# EAGLE board GameB (EAGLE 9.6.2)
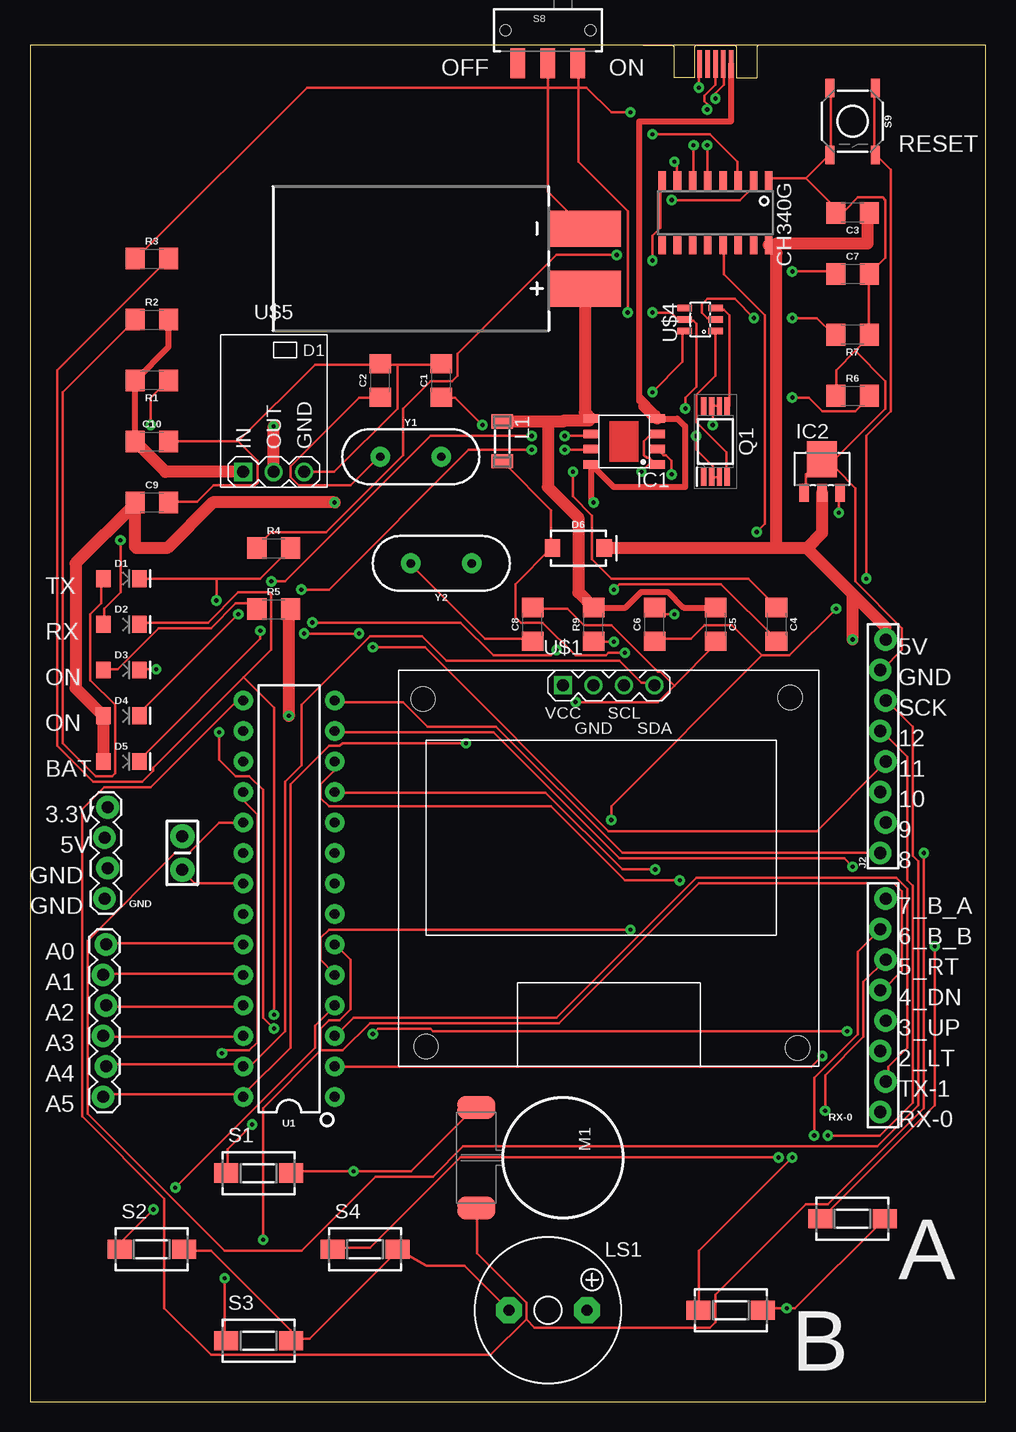
[diagram p0: board, top side]
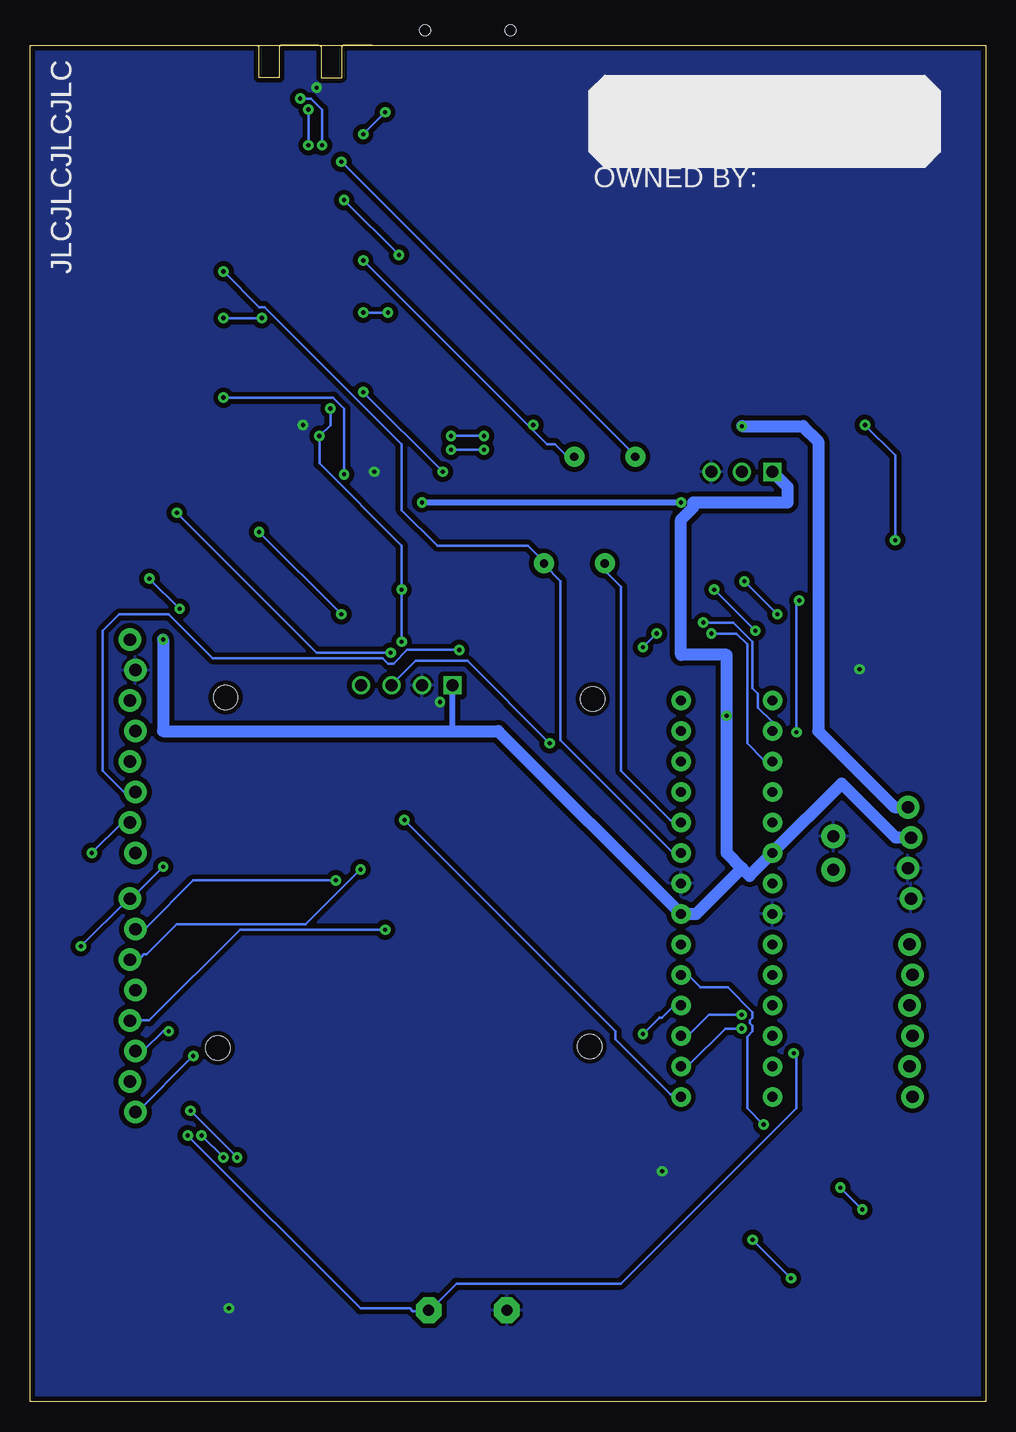
[diagram p1: board, bottom side, seen from below]

Size 79.68 x 113.03 mm. Coordinates in mm from the lower left corner, seen from the top.
Outline: 0,0 79.68,0 79.68,113.02 0,113.02 0,0
Copper layers (1*16): Top 0.035mm / dielectric 1.6mm / Bottom 0.035mm
Design rules "default *": minimum track width 8mil, minimum drill 0.35mm, track to track 10mil, track to pad 10mil, pad to pad 10mil, via to via 10mil, smd to smd 10mil, copper to edge 10mil, drill to drill 10mil, minimum pad ring 10mil, minimum via ring 10mil, stop-mask expansion 10mil, vias tented up to drill 0mil, thermal gap 10mil
Net classes: 0 default: width 0.152 mm, drill 0.305 mm, clearance 0.152 mm

## Footprints (pad centres in the part's own frame; a part is rotated, then mirrored left to right if it is on the bottom)
LIPO-110-TABS = smd 3 x 6: + 2.5,14.5; - -2.5,14.5
1206 = smd 1.6 x 1.8: 1 -1.4,0; 2 1.4,0
CAP-PTH-SMALL-KIT = drill 1.016 pad 2.032: 1 -1.397,0; 2 1.397,0
LED-1206 = smd 1.2 x 1.4: A -1.5,0; C 1.5,0
SMA-DIODE = smd 1.27 x 1.47: A -2.15,0; C 2.15,0
1X04_LOCK = drill 1.016 pad 1.88: 1 0,0.127; 2 2.54,-0.127; 3 5.08,0.127; 4 7.62,-0.127
SOP-8 = smd 1.3 x 0.7: 1 -2.75,1.905; 2 -2.75,0.635; 3 -2.75,-0.635; 4 -2.75,-1.905; 5 2.75,-1.905; 6 2.75,-0.635; 7 2.75,0.635; 8 2.75,1.905
SOT89 = smd 0.8 x 1.5: 1 -1.5,-1.75; 2 0,-1.75; 3 1.5,-1.75 | smd 2.5 x 3: 4 0,1.05
1X08_FEMALE_LOCK = drill 1.016 pad 1.88: 1 0,0.229; 2 2.54,-0.229; 3 5.08,0.229; 4 7.62,-0.229; 5 10.16,0.229; 6 12.7,-0.229; 7 15.24,0.229; 8 17.78,-0.229
1X06_LOCK = drill 1.016 pad 1.88: 1 0,0; 2 2.54,-0.254; 3 5.08,0; 4 7.62,-0.254; 5 10.16,0; 6 12.7,-0.254
SM-1206 = smd 1.2 x 1.8: 1 -1.65,0; 2 1.65,0
F/QMX = drill 0.914 pad 2.159 octagon: + 3.251,0; - -3.251,0
VIBE-MOTOR-10MM-SMD = smd 1.905 x 3.175: + 4.191,-7.239; - -4.191,-7.239
SOP65P640X120-8N = smd 1.475 x 0.45: 1 -2.938,0.975; 2 -2.938,0.325; 3 -2.938,-0.325; 4 -2.938,-0.975; 5 2.938,-0.975; 6 2.938,-0.325; 7 2.938,0.325; 8 2.938,0.975
DTSM-3 = smd 2 x 1.6: 1 -2.7,0; 2 2.7,0
SWITCH_SPDT_SMD = smd 1.2 x 2.5: 1 -2.5,-2.75; 2 0,-2.75; 3 2.5,-2.75 | hole 0.9: -3.55,0; 3.55,0
TACTILE_SWITCH_SMD_5.2MM = smd 1.524 x 0.762: 1 -2.794,1.905; 2 2.794,1.905; 3 -2.794,-1.905; 4 2.794,-1.905
DIP28 = drill 0.813 pad 1.626: 1 -16.51,-3.81; 2 -13.97,-3.81; 3 -11.43,-3.81; 4 -8.89,-3.81; 5 -6.35,-3.81; 6 -3.81,-3.81; 7 -1.27,-3.81; 8 1.27,-3.81; 9 3.81,-3.81; 10 6.35,-3.81; 11 8.89,-3.81; 12 11.43,-3.81; 13 13.97,-3.81; 14 16.51,-3.81; 15 16.51,3.81; 16 13.97,3.81; 17 11.43,3.81; 18 8.89,3.81; 19 6.35,3.81; 20 3.81,3.81; 21 1.27,3.81; 22 -1.27,3.81; 23 -3.81,3.81; 24 -6.35,3.81; 25 -8.89,3.81; 26 -11.43,3.81; 27 -13.97,3.81; 28 -16.51,3.81
DISPLAY-OLED-128X64-I2C = drill 1 square: 1 0,12.7 | drill 1: 2 2.54,12.7; 3 5.08,12.7; 4 7.62,12.7 | hole 2: -11.684,11.557; 18.923,11.684; 19.558,-17.526; -11.43,-17.399
SOIC16 = smd 0.635 x 1.524: 1 -4.445,-2.695; 2 -3.175,-2.695; 3 -1.905,-2.695; 4 -0.635,-2.695; 5 0.635,-2.695; 6 1.905,-2.695; 7 3.175,-2.695; 8 4.445,-2.695; 9 4.445,2.695; 10 3.175,2.695; 11 1.905,2.695; 12 0.635,2.695; 13 -0.635,2.695; 14 -1.905,2.695; 15 -3.175,2.695; 16 -4.445,2.695
USB_TYPE_B_SS_1 = smd 0.37 x 2.3: 1 -1.3,-1.55; 2 -0.65,-1.55; 3 0,-1.55; 4 0.65,-1.55; 5 1.3,-1.55
SOT23-6 = smd 0.55 x 1.2: 1 -0.95,-1.3; 2 0,-1.3; 3 0.95,-1.3; 4 0.95,1.3; 5 0,1.3; 6 -0.95,1.3
REG-AMS1117-3P = drill 1 square: 1 -2.54,-5.08 | drill 1: 2 0,-5.08; 3 2.54,-5.08
HC49US = drill 0.7 pad 1.651: 1 -2.54,0; 2 2.54,0

## Placement (x,y rotation side)
BT1  6.8MM_COIN_CELL  [LIPO-110-TABS]  31.75,95.25 270 top
C1  22p  [1206]  34.29,85.09 90 top
C2  22p  [1206]  29.21,85.09 90 top
C3  12uF  [1206]  68.58,99.06 180 top
C4  100nF  [1206]  62.23,64.77 270 top
C5  10uF  [1206]  57.15,64.77 270 top
C6  100nF  [1206]  52.07,64.77 90 top
C7  22pF  [1206]  68.58,93.98 0 top
C8  22pF  [1206]  41.91,64.77 90 top
C9  0.1p  [1206]  10.16,74.93 0 top
C10  12uF  [1206]  10.16,80.01 0 top
C11  0.1uF  [CAP-PTH-SMALL-KIT]  12.7,45.72 90 top
D1  YELLOW  [LED-1206]  7.62,68.58 0 top
D2  YELLOW  [LED-1206]  7.62,64.77 0 top
D3  GREEN  [LED-1206]  7.62,60.96 0 top
D4  GREEN  [LED-1206]  7.62,57.15 0 top
D5  RED  [LED-1206]  7.62,53.34 0 top
D6  1A/40V/500mV  [SMA-DIODE]  45.72,71.12 0 top
GND  [1X04_LOCK]  6.35,41.91 90 top
IC1  TP4056  [SOP-8]  49.53,80.01 180 top
IC2  L78LXXCU/BU  [SOT89]  66.04,77.47 0 top
J2  [1X08_FEMALE_LOCK]  71.12,45.72 90 top
J3  [1X06_LOCK]  6.35,38.1 270 top
L1  22uH  [SM-1206]  39.37,80.01 270 top
LS1  F/QMX  [F/QMX]  43.18,7.62 0 top
M1  MOTORSHORT  [VIBE-MOTOR-10MM-SMD]  44.45,20.32 270 top
Q1  FS8205A  [SOP65P640X120-8N]  57.15,80.01 90 top
R1  1k  [1206]  10.16,85.09 180 top
R2  1k  [1206]  10.16,90.17 0 top
R3  1k  [1206]  10.16,95.25 0 top
R4  1k  [1206]  20.32,71.12 0 top
R5  1k  [1206]  20.32,66.04 0 top
R6  1.2k  [1206]  68.58,83.82 0 top
R7  1k  [1206]  68.58,88.9 180 top
R9  1k  [1206]  46.99,64.77 90 top
RX-0  [1X08_FEMALE_LOCK]  71.12,24.13 90 top
S1  DTSM-3  [DTSM-3]  19.05,19.05 0 top
S2  DTSM-3  [DTSM-3]  10.16,12.7 0 top
S3  DTSM-3  [DTSM-3]  19.05,5.08 0 top
S4  DTSM-3  [DTSM-3]  27.94,12.7 0 top
S5  DTSM-3  [DTSM-3]  58.42,7.62 0 top
S6  DTSM-3  [DTSM-3]  68.58,15.24 0 top
S8  [SWITCH_SPDT_SMD]  43.18,114.3 0 top
S9  MOMENTARY-SWITCH-SPST-SMD-5.2-REDUNDANT  [TACTILE_SWITCH_SMD_5.2MM]  68.58,106.68 270 top
U1  328P  [DIP28]  21.59,41.91 90 top
U$1  DISPLAY-OLED-128X64-I2C  [DISPLAY-OLED-128X64-I2C]  44.45,46.99 0 top
U$2  CH340G  [SOIC16]  57.15,99.06 180 top
U$3  PCB_MICRO_USB_BSS_1  [USB_TYPE_B_SS_1]  57.15,113.03 0 top
U$4  DW01A  [SOT23-6]  55.88,90.17 90 top
U$5  REG-AMS1117-3P-3.3V  [REG-AMS1117-3P]  20.32,82.55 0 top
Y1  12000  [HC49US]  31.75,78.74 0 top
Y2  16MHz  [HC49US]  34.29,69.85 180 top

## Library data of the parts
BT1 S8 = SparkFun-Retired
C1-C10 = SparkFun-Capacitors
C11 = SparkFun-Capacitors; PROD_ID: CAP-08370
D1 D2 = SparkFun-LED
D3 = SparkFun-LED; PROD_ID: DIO-00862
D4 = SparkFun-LED; PROD_ID: DIO-09911
D5 = SparkFun-LED; PROD_ID: DIO-09912
D6 = SparkFun-DiscreteSemi; PROD_ID: DIO-08053
GND = SparkFun-Connectors; PROD_ID: CONN-09696
IC1 = TP4056
IC2 = v-reg-3
J2 RX-0 = SparkFun-Connectors; PROD_ID: CONN-09233; SF_ID: PRT-09279
J3 = SparkFun-Connectors
L1 = inductor-neosid; OC_FARNELL: unknown; OC_NEWARK: unknown
LS1 = buzzer; OC_FARNELL: unknown; OC_NEWARK: unknown
M1 = SparkFun-Electromechanical; PROD_ID: COMP-13709
Q1 = FS8205A; DESCRIPTION: dual n-channel enhancement mode power MOFSET; HEIGHT: 1.2mm; MANUFACTURER_NAME: SII Semiconductor; MANUFACTURER_PART_NUMBER: FS8205A
R1-R7 R9 = SparkFun-Resistors
S1-S6 = switch-tact
S9 = SparkFun-Switches; PROD_ID: SWCH-08247; SF_SKU: COM-08720
U1 = SparkFun-IC-Microcontroller; PROD_ID: IC-09136
U$1 U$5 = diy-modules
U$2 = ch340g
U$3 = USB_pcb_connectors
U$4 = DW01A
Y1 = SparkFun-Clocks
Y2 = SparkFun-Clocks; PROD_ID: XTAL-08181; SF_ID: COM-00536

## Nets
2: RX-0.3 S2.1 U1.4
3: RX-0.4 S1.1 U1.5
3.3V: GND.4 U$5.2
4: RX-0.5 S3.1 U1.6
5: RX-0.6 S4.1 U1.11
5V: C3.1 C10.1 D6.C GND.3 IC2.2 J2.8 R1.2 R2.2 R5.2 U1.7 U1.20 U$1.1 U$2.16 U$5.1
6: RX-0.7 S5.1 U1.12
7: RX-0.8 S6.1 U1.13
8: J2.1 U1.14
9: J2.2 M1.+ U1.15
A0: J3.1 U1.23
A1: J3.2 U1.24
A2: J3.3 U1.25
A3: J3.4 U1.26
A4: J3.5 U1.27 U$1.4
A5: J3.6 U1.28 U$1.3
GND: C1.2 C2.2 C3.2 C5.2 C7.2 C8.2 C9.2 C10.2 C11.2 D3.C GND.1 GND.2 IC1.1 IC1.3 IC2.1 IC2.4 J2.7 LS1.- M1.- Q1.6 Q1.7 R6.1 R7.1 S1.2 S2.2 S3.2 S4.2 S5.2 S6.2 S9.3 S9.4 U1.8 U1.22 U$1.2 U$2.1 U$3.1 U$5.3
MISO: J2.5 LS1.+ U1.18
MOSI: J2.4 U1.17
N$1: U$2.6 U$3.4
N$2: U$2.5 U$3.3
N$5: D2.A R1.1
N$6: D1.A R2.1
N$7: C1.1 U$2.8 Y1.2
N$8: C2.1 U$2.7 Y1.1
N$9: BT1.+ C5.1 IC1.5 L1.1 R9.2
N$10: R3.1 U$2.3
N$11: R4.1 U$2.2
N$12: D3.A R5.1
N$13: D6.A IC2.3 L1.2
N$15: D4.C IC1.6
N$16: IC1.2 R6.2
N$17: C9.1 D4.A D5.A IC1.4 IC1.8 U$3.5
N$18: D5.C IC1.7
N$19: C6.2 U$2.13
N$29: R7.2 U$4.2
N$30: Q1.5 U$4.3
N$31: Q1.4 U$4.1
N$32: C4.2 Q1.2 Q1.3 R9.1 S8.3 U$4.5
N$33: C4.1 U$4.6
N$34: BT1.- S8.2
N$35: C6.1 S9.1 S9.2 U1.1
N$36: C7.1 U1.9 Y2.1
N$37: C8.1 U1.10 Y2.2
N$38: C11.1 U1.21
RX0: D1.C R4.2 RX-0.1 U1.2
SCK: J2.6 U1.19
SS: J2.3 U1.16
TX1: D2.C R3.2 RX-0.2 U1.3

## Tracks (layer width: path | path; a pad name or v marks a point on that pad's centre or on a via)
2  (via drill 0.35)
  Top 0.203: v10.29,16 7.54,13.26 7.54,12.8 S2.1 | v12.12,17.83 23.77,29.49 23.77,31.32 25.38,32.92 U1.4 | v68.12,30.86 33.6,30.86 33.38,31.09 29.03,31.09 v28.57,30.63
  Bottom 0.203: v12.12,17.83 v10.29,16 | v68.12,30.86 68.58,30.86 70.18,29.26 70.87,29.26 RX-0.3 | v28.57,30.63 27.2,32 26.98,32 26.06,32.92 25.6,32.92 U1.4
3  (via drill 0.35)
  Top 0.203: v18.52,23.09 16.46,21.03 16.46,19.2 S1.1 | v50.06,39.32 24.92,39.32 24.23,38.63 24.23,36.8 25.38,35.66 U1.5
  Bottom 0.203: v18.52,23.09 19.89,24.46 19.89,30.4 19.43,30.86 19.43,31.32 19.66,31.55 19.66,31.77 19.43,32 19.43,32.46 21.49,34.52 23.77,34.52 24.69,35.43 25.38,35.43 U1.5 | v50.06,39.32 62.18,39.32 69.72,31.77 71.32,31.77 RX-0.4
3.3V  (via drill 0.35)
  Top 1.016: U$5.2 v20.32,81.28
  Bottom 1.016: v20.32,81.28 15.24,81.28 13.97,80.01 13.97,55.88 7.62,49.53 GND.4
4  (via drill 0.35)
  Top 0.203: v16.23,10.29 16.23,5.26 S3.1 | v19.43,13.49 19.43,24.46 24.23,29.26 | 24.23,29.26 24.23,31.09 24.92,31.77 25.83,31.77 26.75,32.69 26.75,36.8 25.6,37.95 U1.6 | 24.23,29.26 26.06,29.26 28.35,31.55 44.12,31.55 55.78,43.2 72.01,43.2 72.69,42.52 72.69,35.89 71.09,34.29 RX-0.5
  Bottom 0.203: v19.43,13.49 v16.23,10.29
5  (via drill 0.35)
  Top 0.203: v62.41,20.34 35.89,20.34 28.35,12.8 25.38,12.8 S4.1 | v66.29,24.23 66.29,27.2 69.49,30.4 69.49,34.98 RX-0.6 | v52.12,44.35 49.38,44.35 42.98,50.75 25.6,50.75 U1.11
  Bottom 0.203: v66.29,24.23 v62.41,20.34 | v52.12,44.35 56.69,39.78 67.44,39.78 69.95,37.26 70.18,37.26 70.41,37.03 71.32,37.03 RX-0.6
5V  (via drill 0.35)
  Top 0.203: 62.23,96.52 61.95,96.7 61.61,96.35
  Top 0.508: 69.85,98.93 C3.1 | 71.35,64.54 J2.8 | 48.26,71.12 D6.C | 21.59,65.91 R5.2 | C10.1 R1.2 11.56,87.89 R2.2
  Top 1.016: 64.77,71.12 62.23,71.12 | IC2.2 66.04,72.39 64.77,71.12 | 64.77,71.12 68.58,67.31 | 71.35,64.54 68.58,67.31 | 62.23,71.12 62.23,95.73 61.61,96.35 U$2.16 | 62.23,71.12 48.26,71.12 | 68.58,67.31 v68.58,63.5 | v21.59,57.15 21.59,65.91 | U$5.1 11.3,77.47 C10.1 | 62.23,96.52 69.85,96.52 69.85,98.93
  Bottom 0.508: 44.45,55.88 U$1.1
  Bottom 1.016: v68.58,63.5 68.58,55.88 44.45,55.88 40.64,55.88 U1.7 24.13,40.64 20.32,44.45 | GND.3 7.49,46.99 12,51.5 U1.20 19.68,43.81 20.32,44.45 | 20.32,44.45 21.59,45.72 v21.59,57.15 21.59,62.23 25.4,62.23 25.4,73.49 24.38,74.51 24.38,74.93 16.51,74.93 16.51,76.2 U$5.1
6  (via drill 0.35)
  Top 0.203: v63.55,20.34 55.78,12.57 55.78,7.77 S5.1 | v65.38,22.17 65.38,26.98 69.04,30.63 69.04,37.49 70.87,39.32 RX-0.7 | v54.18,43.43 49.61,43.43 43.43,49.61 24.92,49.61 24.23,50.29 24.23,51.44 25.38,52.58 25.38,53.26 U1.12
  Bottom 0.203: v65.38,22.17 v63.55,20.34 | v54.18,43.43 66.06,43.43 69.95,39.55 70.87,39.55 RX-0.7
7  (via drill 0.35)
  Top 0.203: v75.44,37.95 75.44,24.69 66.06,15.32 S6.1 | v68.58,44.58 67.89,45.26 49.15,45.26 38.63,55.78 25.6,55.78 U1.13
  Bottom 0.203: v75.44,37.95 71.55,41.83 RX-0.8 71.32,41.83 v68.58,44.58
8
  Top 0.203: J2.1 49.38,45.72 38.86,56.24 33.15,56.24 31.09,58.29 25.6,58.29 U1.14
9  (via drill 0.35)
  Top 0.203: 41.38,6.86 41.38,8.23 37.26,12.34 37.26,16 M1.+ | 41.38,6.86 38.41,3.89 15.09,3.89 11.2,7.77 11.2,16.92 4.34,23.77 4.34,49.38 6.17,51.21 10.06,51.21 17.14,58.29 17.6,58.29 U1.15 | v74.52,45.72 74.52,24.46 66.52,16.46 64.69,16.46 57.15,8.91 57.15,6.63 56.69,6.17 42.06,6.17 41.38,6.86
  Bottom 0.203: v74.52,45.72 72.01,48.23 71.55,48.23 J2.2
A0
  Top 0.203: U1.23 17.6,38.18 6.4,38.18 J3.1
A1
  Top 0.203: U1.24 17.6,35.66 6.17,35.66 J3.2
A2
  Top 0.203: U1.25 17.6,32.92 6.4,32.92 J3.3
A3
  Top 0.203: U1.26 17.6,30.4 6.17,30.4 J3.4
A4
  Top 0.203: U$1.4 51.89,59.89 50.98,59.89 49.15,61.72 34.75,61.72 32.69,63.78 28.35,63.78 22.63,58.06 22.63,53.03 21.26,51.66 21.26,30.86 18.52,28.12 17.83,28.12 U1.27 17.6,28.12 6.4,28.12 J3.5
A5  (via drill 0.35)
  Top 0.203: v36.35,54.86 26.06,54.86 25.83,54.63 24.92,54.63 21.72,51.44 21.72,29.49 17.83,25.6 U1.28 17.6,25.6 6.17,25.6 J3.6
  Bottom 0.203: v36.35,54.86 43.2,61.72 47.55,61.72 49.38,59.89 U$1.3
GND  (via drill 0.35)
  Top 0.203: 64.69,101.96 61.72,101.96 U$2.1 | 64.69,101.96 66.52,103.78 S9.4 66.75,104.01 66.75,109.27 S9.3 | 64.69,101.96 66.98,99.67 66.98,99.21 C3.2 67.21,99.21 67.89,99.21 69.04,100.36 71.09,100.36 71.32,100.13 71.32,95.33 70.18,94.18 C7.2 69.95,93.95 69.95,88.92 R7.1 69.95,88.7 68.81,87.55 | IC2.1 64.69,75.89 64.69,77.27 65.84,78.41 IC2.4 | 68.81,87.55 67.21,85.95 67.21,83.9 R6.1 | 67.21,78.64 66.06,78.64 IC2.4 | 67.21,78.64 71.32,82.75 71.32,85.04 68.81,87.55 | S2.2 13.03,12.57 15.09,12.57 21.72,5.94 21.72,5.26 S3.2 21.95,5.26 23.32,5.26 30.63,12.57 S4.2 33.07,11.3 36.25,11.3 LS1.- | S1.2 21.95,19.2 v26.98,19.2 31.77,19.2 37.03,24.46 M1.- | S5.2 61.27,7.77 v63.09,7.77 63.78,7.77 71.09,15.09 S6.2 | 17.37,80.01 18.97,78.41 18.97,76.58 18.75,76.35 15.32,76.35 13.95,74.98 11.66,74.98 C9.2 | C10.2 17.37,80.01 | 30.63,86.41 34.29,86.41 C1.2 | 30.63,86.41 29.26,86.41 C2.2 29.03,86.41 23.77,86.41 17.37,80.01 | 51.89,78.41 51.66,78.64 51.44,78.64 51.21,78.87 51.21,80.01 51.66,80.47 52.12,80.47 IC1.3 | 51.89,78.41 52.12,78.18 IC1.1 51.89,78.41 | Q1.6 57.38,82.98 56.92,82.98 Q1.7 56.92,82.75 v56.92,81.38 | v10.52,61.04 9.14,61.04 D3.C | v45.49,58.29 52.35,58.29 53.72,59.66 | 53.72,59.66 57.15,63.09 C5.2 | 53.72,59.66 52.58,60.81 52.35,60.81 48.46,64.69 46.18,64.69 44.81,66.06 42.06,66.06 C8.2 | v50.98,77.5 51.89,78.41 | v55.78,109.5 55.78,111.33 U$3.1 | 30.63,86.41 30.63,82.75 25.38,77.5 22.86,77.5 U$5.3 | 67.21,78.64 67.21,77.72 68.81,76.12 68.81,68.35 72.69,64.47 72.69,62.64 71.09,61.04 J2.7 | 67.21,78.64 IC2.4
  pour Bottom (isolate 0.406): 0,113.03 0,0 80.01,0 80.01,113.03
MISO  (via drill 0.35)
  Top 0.203: v16,29.03 16.23,29.26 18.29,29.26 18.97,29.95 18.97,48.92 17.83,50.06 17.83,50.75 U1.18 | v66.52,22.17 70.87,22.17 73.61,24.92 73.61,42.98 73.15,43.43 73.15,53.72 71.09,55.78 J2.5
  Bottom 0.203: v16,29.03 15.77,28.8 15.77,24.46 30.4,9.83 44.12,9.83 46.41,7.54 LS1.+ 46.63,7.54 47.78,7.54 48.01,7.77 52.12,7.77 v66.52,22.17
MOSI  (via drill 0.35)
  Top 0.203: v27.43,64.01 v22.86,64.01 | v28.57,62.87 32.92,62.87 48.23,47.55 65.61,47.55 71.32,53.26 J2.4
  Bottom 0.203: v22.86,64.01 20.8,64.01 19.89,63.09 19.89,54.86 18.52,53.49 17.83,53.49 U1.17 | v28.57,62.87 v27.43,64.01
N$1  (via drill 0.35)
  Top 0.203: v55.32,104.7 55.32,101.96 U$2.6 | v57.15,108.58 57.15,109.04 57.84,109.73 57.84,111.33 U$3.4
  Bottom 0.203: v55.32,104.7 55.32,107.67 56.24,108.58 v57.15,108.58
N$2  (via drill 0.35)
  Top 0.203: v56.46,104.7 56.46,101.96 U$2.5 | v56.46,107.67 56.46,108.13 56.24,108.36 56.24,108.81 57.15,109.73 U$3.3
  Bottom 0.203: v56.46,107.67 v56.46,104.7
N$5  (via drill 0.35)
  Top 0.203: v7.54,71.78 7.54,67.44 6.17,66.06 6.17,64.92 D2.A | v10.06,81.38 10.06,83.67 11.43,85.04 R1.1
  Bottom 0.203: v7.54,71.78 7.54,78.87 v10.06,81.38
N$6
  Top 0.203: D1.A 5.94,68.58 5.94,66.52 5.03,65.61 5.03,60.12 7.09,58.06 7.09,52.35 6.86,52.12 5.49,52.12 2.74,54.86 2.74,84.12 8.69,90.07 R2.1
N$7  (via drill 0.35)
  Top 0.203: v51.89,95.1 51.89,97.16 52.58,97.84 52.58,101.73 U$2.8 | v37.72,81.38 35.43,83.67 34.29,83.67 C1.1
  Bottom 0.203: 37.95,81.15 36.58,79.78 35.89,79.78 34.98,78.87 34.29,78.87 Y1.2 | 37.95,81.15 v51.89,95.1 | 37.95,81.15 v37.72,81.38
N$8  (via drill 0.35)
  Top 0.203: v53.72,103.33 53.95,103.1 53.95,101.96 U$2.7 | C2.1 29.03,83.67 27.43,83.67 21.72,77.95 21.72,77.04 22.4,76.35 26.75,76.35 29.03,78.64 Y1.1
  Bottom 0.203: v53.72,103.33 29.26,78.87 Y1.1
N$9
  Top 0.508: L1.1 43.18,81.66 46.52,81.66 IC1.5 | R9.2 49.65,66.17 50.96,67.48 53.18,67.48 54.49,66.17 C5.1
  Top 1.016: 43.18,81.66 43.18,76.2 45.72,73.66 45.72,67.44 R9.2 | BT1.+ 46.25,82.44 IC1.5 46.62,81.76 44.54,81.76 44.45,81.66 L1.1
N$10  (via drill 0.35)
  Top 0.203: v51.89,105.61 56.69,105.61 58.98,103.33 58.98,101.96 U$2.3 | v50.06,107.44 48.46,107.44 46.41,109.5 23.09,109.5 8.91,95.33 R3.1
  Bottom 0.203: v50.06,107.44 v51.89,105.61
N$11  (via drill 0.35)
  Top 0.203: v53.49,100.13 59.21,100.13 60.12,101.04 60.12,101.73 U$2.2 | v48.92,95.56 43.89,95.56 35.66,87.33 35.66,85.5 35.2,85.04 33.38,85.04 31.09,82.75 31.09,78.87 24.69,72.47 20.12,72.47 18.97,71.32 R4.1
  Bottom 0.203: v48.92,95.56 v53.49,100.13
N$12
  Top 0.203: D3.A 6.17,61.04 7.32,61.04 10.74,64.47 15.09,64.47 17.14,66.52 18.29,66.52 18.75,66.06 R5.1
N$13  (via drill 0.35)
  Top 0.203: L1.2 39.55,78.18 43.43,74.3 43.43,71.32 D6.A 43.43,71.09 40.46,68.12 40.46,65.38 40.92,64.92 42.75,64.92 45.49,62.18 48.01,62.18 48.23,62.41 v49.61,62.41 | v67.44,74.07 67.44,75.67 IC2.3
  Bottom 0.203: v67.44,74.07 55.78,62.41 v49.61,62.41
N$15  (via drill 0.35)
  Top 0.203: v44.58,80.47 46.63,80.47 IC1.6 | v41.83,80.47 33.38,80.47 21.26,68.35 v20.12,68.35 | v17.37,65.61 8.91,57.15 D4.C
  Bottom 0.203: v41.83,80.47 v44.58,80.47 | v17.37,65.61 v20.12,68.35
N$16  (via drill 0.35)
  Top 0.203: v53.49,77.27 53.49,78.41 53.03,78.87 52.81,78.87 52.35,79.32 IC1.2 | v63.55,83.67 64.92,83.67 66.06,82.53 68.81,82.53 69.95,83.67 R6.2
  Bottom 0.203: v53.49,77.27 53.49,82.75 54.41,83.67 v63.55,83.67
N$17  (via drill 0.35)
  Top 0.508: U$3.5 58.45,106.71 58.42,106.68 50.8,106.68 50.8,83.82 | 50.8,83.39 50.8,83.82 | 50.8,83.82 52.28,82.34 IC1.4 53.98,81.92 54.61,81.28 54.61,76.2 48.69,76.2 IC1.8 46.78,75.14 v46.99,74.93
  Top 1.016: IC1.4 51.22,82.97 | v25.4,74.93 15.24,74.93 11.43,71.12 8.89,71.12 8.76,71.25 C9.1 8.76,74.8 3.81,69.85 3.81,59.46 D4.A D5.A
  Bottom 0.508: v46.99,74.93 v25.4,74.93
N$18  (via drill 0.35)
  Top 0.203: v44.58,79.32 46.63,79.32 IC1.7 | v41.83,79.32 36.58,79.32 24.92,67.67 v22.63,67.67 | v19.2,64.24 19.2,63.55 9.14,53.49 D5.C
  Bottom 0.203: v41.83,79.32 v44.58,79.32 | v19.2,64.24 v22.63,67.67
N$19  (via drill 0.35)
  Top 0.203: v60.58,72.47 61.27,73.15 61.27,90.53 57.84,93.95 57.84,96.24 U$2.13 | v53.72,65.61 52.58,65.61 52.12,66.06 C6.2
  Bottom 0.203: v53.72,65.61 v60.58,72.47
N$29  (via drill 0.35)
  Top 0.203: v60.35,90.3 58.75,91.9 56.46,91.9 56.01,91.44 56.01,90.75 56.46,90.3 57.15,90.3 U$4.2 | v63.55,90.3 65.61,90.3 66.98,88.92 R7.2
  Bottom 0.203: v63.55,90.3 v60.35,90.3
N$30
  Top 0.203: U$4.3 57.38,90.98 57.84,90.98 58.29,90.53 58.29,82.98 Q1.5
N$31
  Top 0.203: U$4.1 57.15,89.15 57.15,85.5 55.55,83.9 55.55,81.61 58.06,79.1 58.06,77.27 Q1.4
N$32  (via drill 0.35)
  Top 0.203: v54.63,82.75 54.63,83.67 55.55,84.58 55.55,89.84 55.32,90.07 54.63,90.07 U$4.5 54.41,90.3 53.95,90.3 53.49,90.75 v51.89,90.75 | v55.55,80.47 55.55,79.32 56.92,77.95 56.92,77.27 Q1.2 56.92,77.04 57.38,77.04 Q1.3 | v48.69,63.32 47.09,63.32 R9.1 | v48.69,67.67 49.15,68.12 57.61,68.12 62.18,63.55 C4.2 | v49.84,90.75 49.84,99.21 45.72,103.33 45.72,111.48 S8.3
  Bottom 0.203: v54.63,82.75 54.63,81.38 v55.55,80.47 55.55,78.18 48.69,71.32 v48.69,67.67 v48.69,63.32 | v51.89,90.75 v49.84,90.75
N$33  (via drill 0.35)
  Top 0.203: v51.89,84.12 54.41,86.64 54.41,89.15 U$4.6 | v45.26,77.5 45.26,75.44 46.86,73.84 46.86,70.18 48.46,68.58 59.89,68.58 62.18,66.29 C4.1
  Bottom 0.203: v45.26,77.5 v51.89,84.12
N$34
  Top 0.203: S8.2 43.2,111.48 43.2,100.81 46.18,97.84 BT1.-
N$35  (via drill 0.35)
  Top 0.203: S9.1 70.41,109.27 70.41,104.01 S9.2 70.64,103.78 71.78,102.64 71.78,82.53 69.72,80.47 v69.72,68.58 | 61.04,62.18 58.52,64.69 56.24,64.69 55.09,63.55 52.12,63.55 C6.1 | 61.04,62.18 63.32,62.18 v67.21,66.06 | v48.46,48.46 48.46,49.61 61.04,62.18
  Bottom 0.203: v69.72,68.58 v67.21,66.06 | v48.46,48.46 30.86,30.86 30.86,30.18 26.29,25.6 25.6,25.6 U1.1
N$36  (via drill 0.35)
  Top 0.203: v63.55,94.18 66.98,94.18 C7.1
  Bottom 0.203: v63.55,94.18 60.58,91.21 60.12,91.21 48.69,79.78 48.69,74.3 45.72,71.32 38.18,71.32 36.8,69.95 Y2.1 36.8,69.72 35.43,68.35 35.43,55.09 26.06,45.72 U1.9
N$37
  Top 0.203: C8.1 41.83,63.55 37.95,63.55 31.77,69.72 Y2.2
  Bottom 0.203: U1.10 25.6,48.46 26.29,48.46 30.4,52.58 30.4,67.89 31.55,69.04 31.55,69.72 Y2.2
N$38
  Top 0.203: U1.21 17.6,43.2 13.72,43.2 12.8,44.12 C11.1
RX0  (via drill 0.35)
  Top 0.203: 15.54,68.58 19.2,68.58 21.72,71.09 R4.2 | 15.54,68.58 D1.C | v66.06,28.8 65.15,27.89 25.6,27.89 U1.2 | v15.54,66.75 15.54,68.58 | v15.77,55.78 15.77,53.49 17.14,52.12 18.29,52.12 19.43,50.98 19.43,32 v20.34,31.09
  Bottom 0.203: v66.06,28.8 70.87,24 RX-0.1 | v15.54,66.75 15.77,66.52 v15.77,55.78 | v20.34,31.09 21.72,31.09 24.69,28.12 25.38,28.12 U1.2
SCK
  Top 0.203: U1.19 17.6,48.23 15.77,48.23 13.26,45.72 12.12,45.72 4.8,38.41 4.8,24 16.23,12.57 22.63,12.57 28.8,18.75 33.6,18.75 36.12,21.26 70.64,21.26 74.07,24.69 74.07,45.03 73.61,45.49 73.61,56.24 71.55,58.29 J2.6
SS  (via drill 0.35)
  Top 0.203: v23.55,64.92 35.89,64.92 38.63,62.18 43.43,62.18 v43.89,62.64
  Bottom 0.203: v23.55,64.92 21.03,64.92 19.43,63.32 19.43,59.44 18.97,58.98 18.97,57.84 17.83,56.69 17.83,56.01 U1.16 | v43.89,62.64 48.23,62.64 49.38,61.49 49.84,61.49 50.29,61.95 64.47,61.95 68.12,65.61 72.24,65.61 73.61,64.24 73.61,52.58 71.78,50.75 71.09,50.75 J2.3
TX1  (via drill 0.35)
  Top 0.203: 17.83,60.35 10.29,52.81 10.29,52.58 9.37,51.66 5.26,51.66 2.29,54.63 2.29,85.95 11.43,95.1 R3.2 | 17.83,60.35 20.12,62.64 20.12,67.21 19.89,67.44 17.37,67.44 14.86,64.92 9.14,64.92 D2.C | v20.34,32.23 20.34,57.84 17.83,60.35 | RX-0.2 71.55,26.75 71.55,27.89 73.15,29.49 73.15,42.75 72.24,43.66 55.55,43.66 43.89,32 26.98,32 25.6,30.63 U1.3
  Bottom 0.203: v20.34,32.23 23.09,32.23 24.69,30.63 25.38,30.63 U1.3

## Text on the board
tPlace: OFF | ON | RESET | TX | RX | 5V | ON | GND | SCK | ON | 12 | BAT | 11 | 10 | 3.3V | 9 | 5V | 8 | GND | GND | 7 | 6 | A0 | 5 | A1 | 4 | A2 | 3 | A3 | 2 | A4 | TX-1 | A5 | RX-0
tNames: _B_A | _B_B | _RT | _DN | _UP | _LT | A | B
bNames: OWNED BY: | JLCJLCJLCJLC